# Altium PCB NEURAL_ECG.PcbDoc
Units mm, origin at the board's own origin, x right, y up, seen from the top; angles counter-clockwise.
Board outline 57.18 x 52.28 mm, 2 copper layers (Top Layer, Bottom Layer); 87 components, 158 nets, 421 pads, 93 vias.
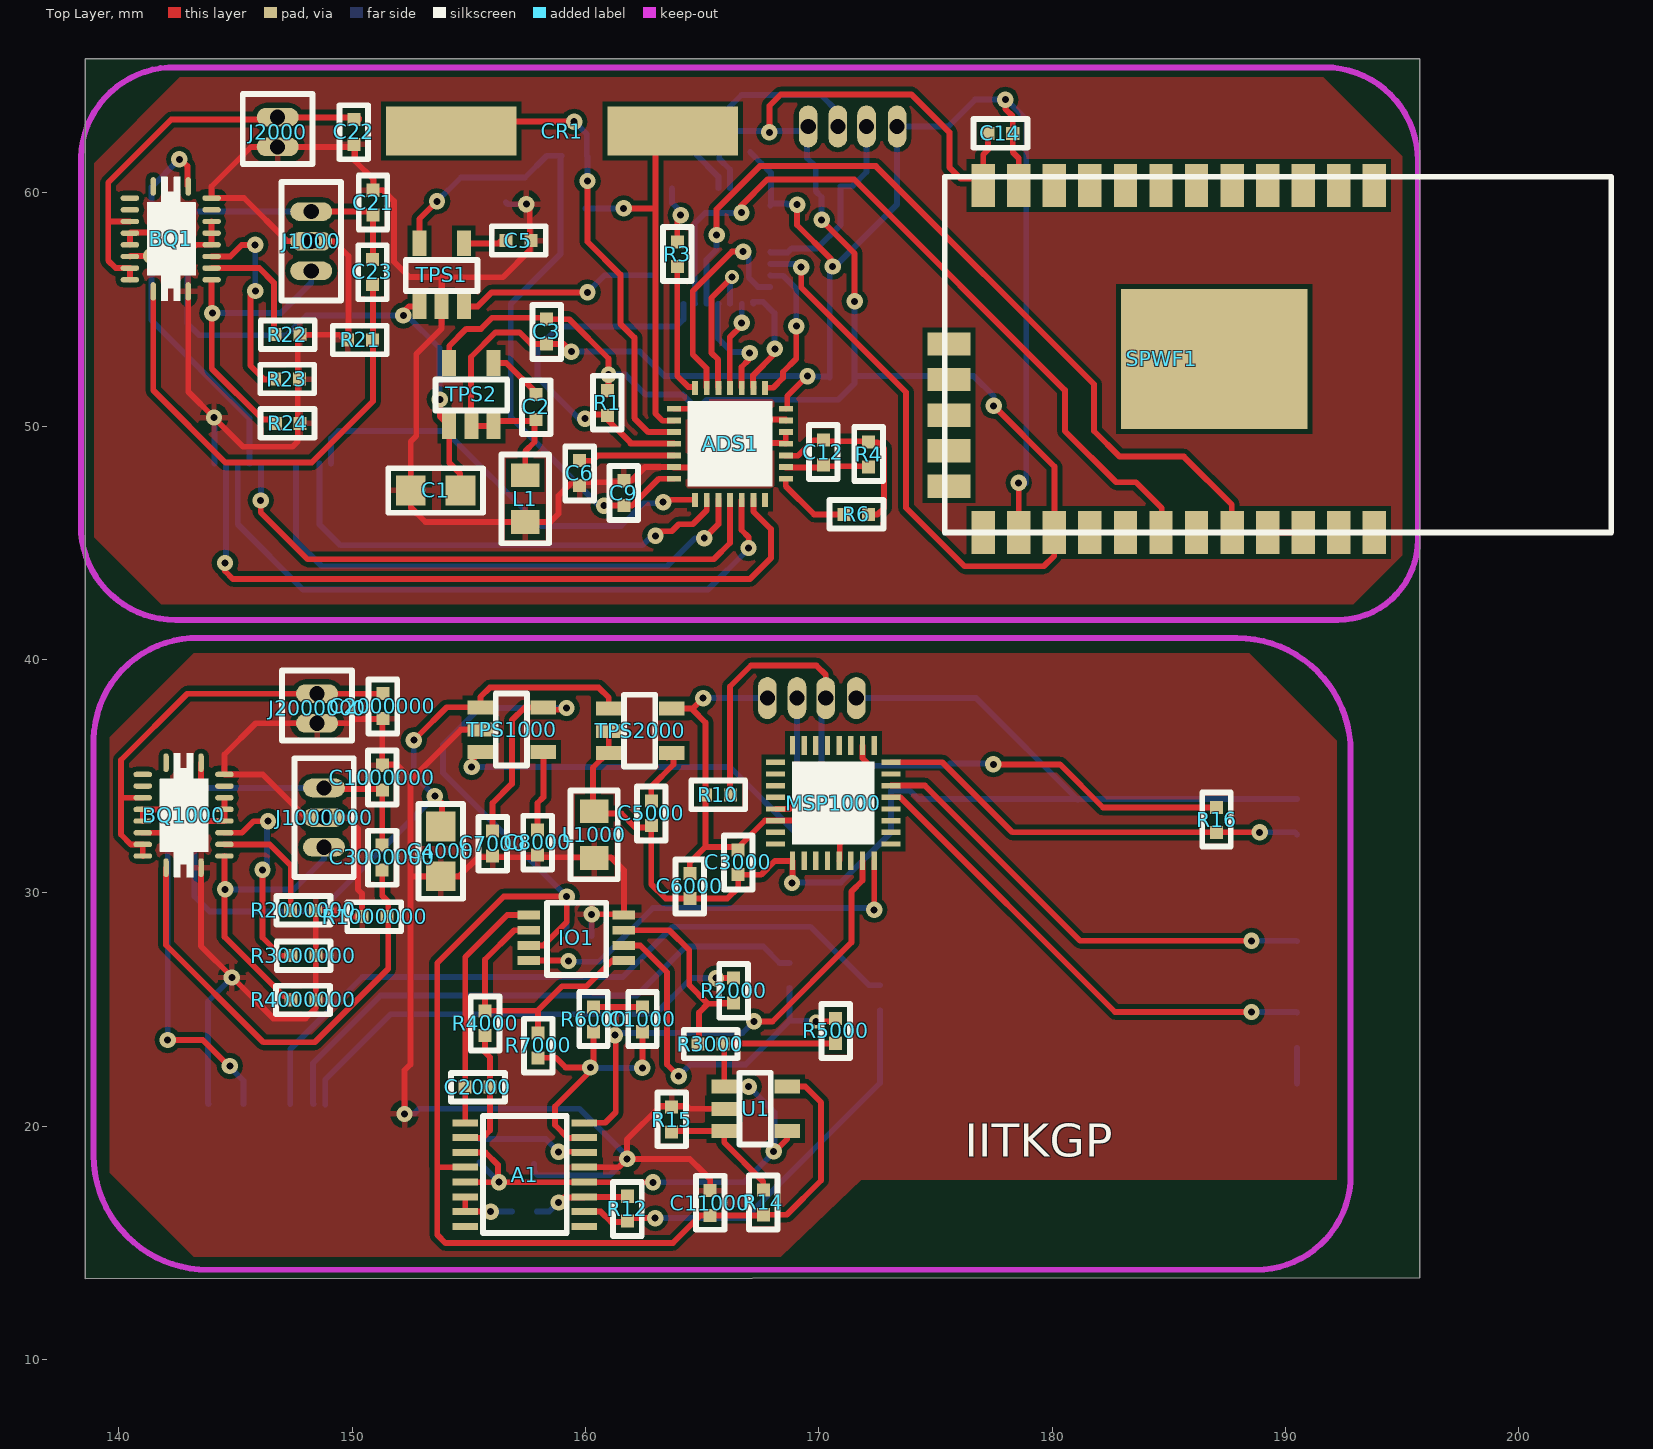
[diagram p0: Top Layer view]
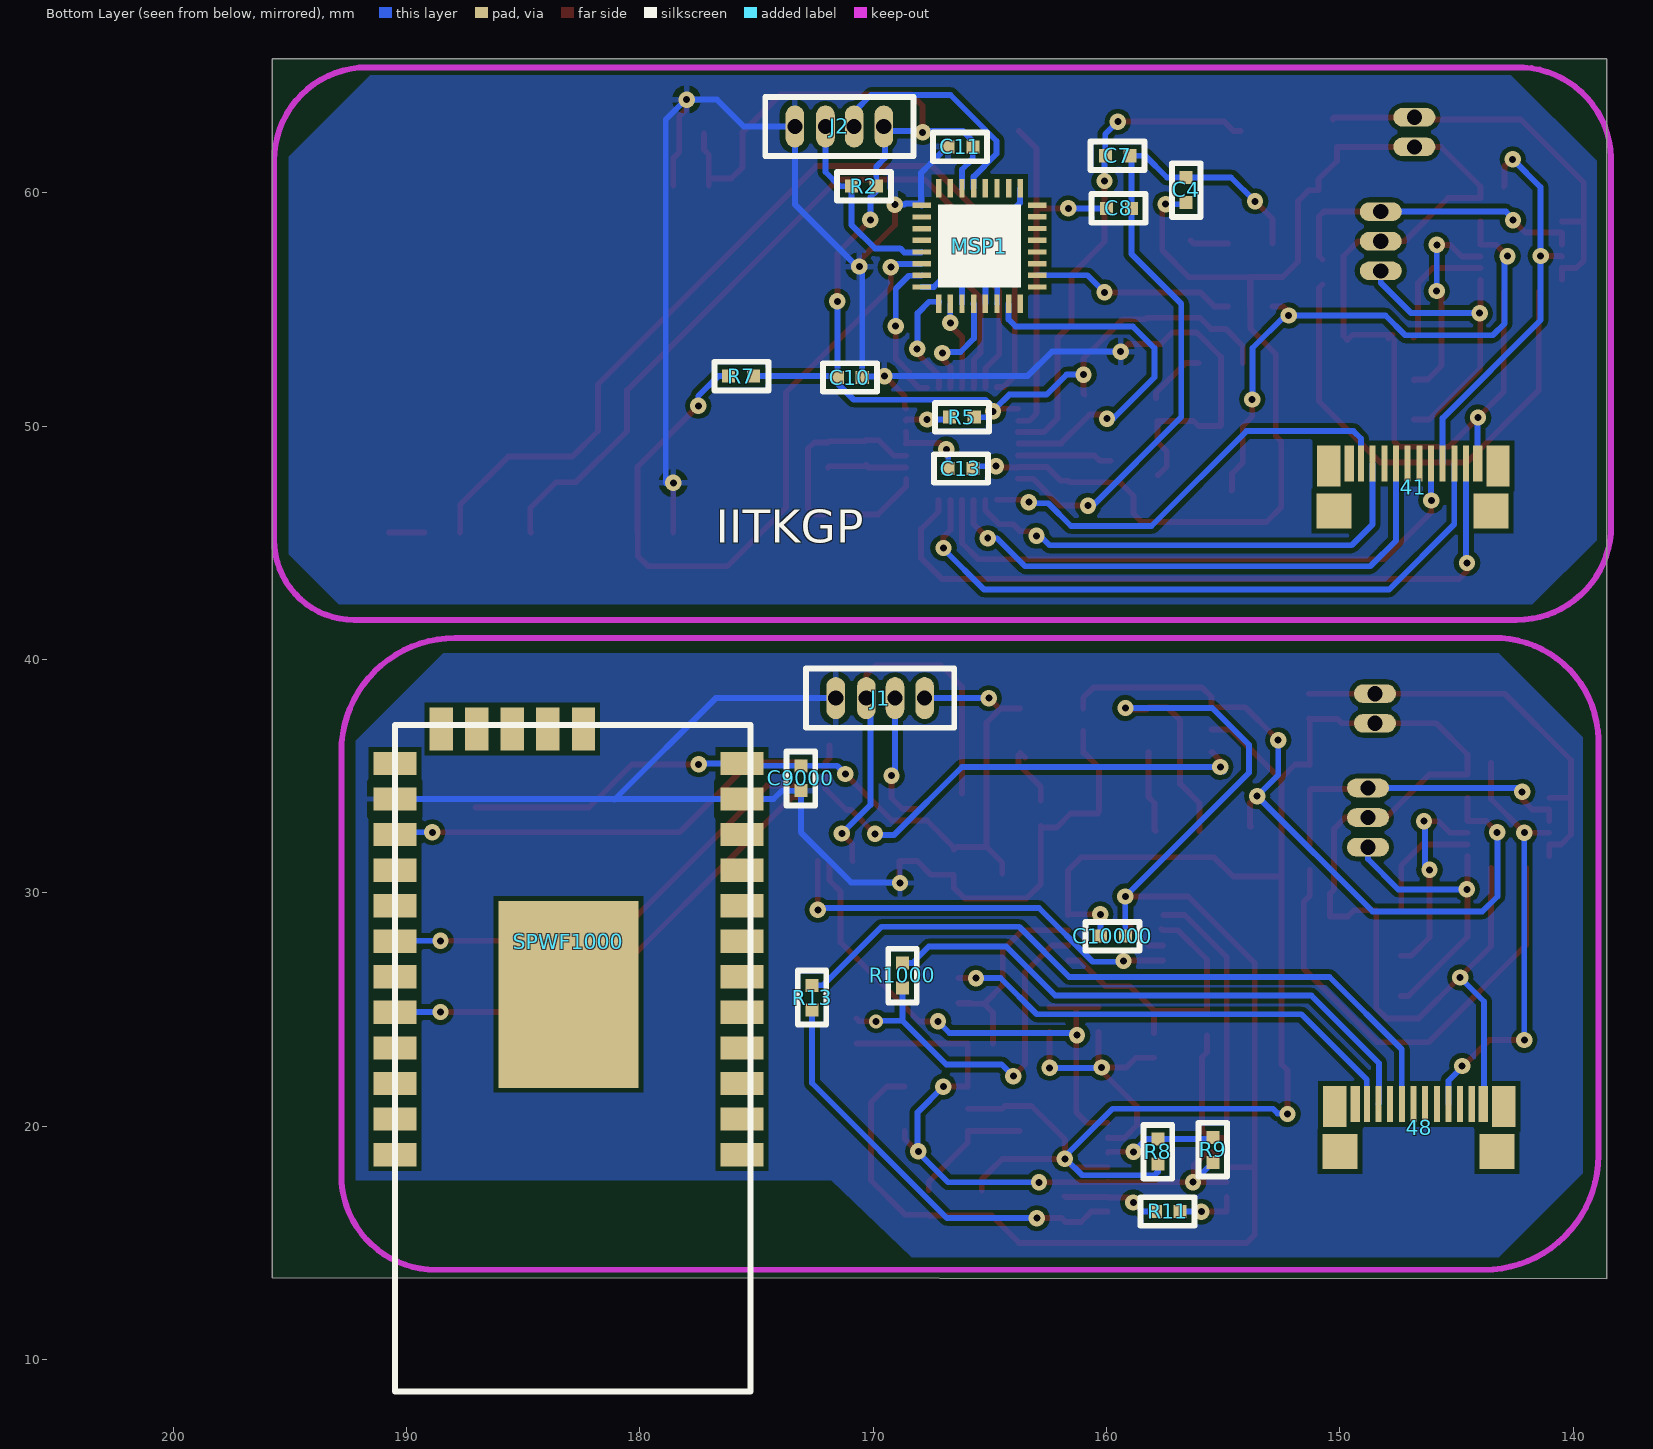
[diagram p1: Bottom Layer view, seen from below]

## Layer stack, top to bottom
Top Solder: solder mask 0.0102, Solder Resist, Dk 3.5
Top Layer: signal copper 0.0356
Dielectric 1: dielectric 0.32, FR-4, Dk 4.8
Bottom Layer: signal copper 0.0356
Bottom Solder: solder mask 0.0102, Solder Resist, Dk 3.5

## Board outline
138.575,65.75 138.575,13.474 195.75,13.502 195.75,65.75

## Design rules (kind name [scope] priority, off if disabled: settings)
Clearance [All] p1: gap=0.2 except(0.1: Track-THPad SMDPad-SMDPad Track-SMDPad THPad-THPad SMDPad-THPad; 0.254: Text-Text Region-Region Region-Text)
HoleSize [All] p1: absolutevalues=TRUE maxlimit=6 minlimit=0.3 maxpercent=80.000 minpercent=20.000
HoleToHoleClearance [All] p1: gap=0.2 allowstackedmicrovias=FALSE
MinimumSolderMaskSliver [All] p1: minsoldermaskwidth=0.1
PlaneConnect [All] p1: planeconnectstyle=Relief reliefexpansion=0.635 reliefentries=4 reliefconductorwidth=0.305 reliefairgap=0.254
PolygonConnect [All] p1: connectstyle=Relief reliefconductorwidth=0.254 reliefentries=4 polygonreliefangle="90 Angle" airgapwidth=0.254
RoutingVias [All] p1: holewidth=0.3 width=0.6 viastyle="Through Hole" minholewidth=0.3 minwidth=0.6 maxholewidth=1 maxwidth=2
SilkToSilkClearance [All] p1: silktosilkclearance=0
SilkToSolderMaskClearance [IsPad] p1: minsilkscreentomaskgap=0 clearancetoexposedcopper=TRUE
SolderMaskExpansion [All] p1: expansion=0.05
UnpouredPolygon [All] p1: allowunpoured=FALSE
Width Net_Width_13 [InNet('NET_432') Or InNet('T1') Or InNet('T2') Or InNet('VI00') Or InNet('VIN1') Or InNet('VREF') Or InNet('VREF00')] p1: maxlimit=0.3 minlimit=0.25 preferedwidth=0.25
Width Net_Width_12 [InNet('NET_58') Or InNet('NET_59') Or InNet('NET_60') Or InNet('NET_61') Or InNet('NET_62') Or InNet('NET_150') Or InNet('NET_151') Or InNet('NET_152') Or InNet('NET_153') Or InNet('NET_154') Or InNet('NET_155') Or InNet('NET_412') Or InNet('NET_422')] p2: maxlimit=0.3 minlimit=0.25 preferedwidth=0.25
Width Net_Width_11 [InNet('N2576742') Or InNet('N2590782') Or InNet('NET_44') Or InNet('NET_45') Or InNet('NET_47') Or InNet('NET_48') Or InNet('NET_49') Or InNet('NET_50') Or InNet('NET_51') Or InNet('NET_52') Or InNet('NET_53') Or InNet('NET_54') Or InNet('NET_55')] p3: maxlimit=0.3 minlimit=0.25 preferedwidth=0.25
Width Net_Width_10 [InNet('N1594672') Or InNet('N1621192') Or InNet('N2505072') Or InNet('N2505152') Or InNet('N2505592') Or InNet('N255762') Or InNet('N257674') Or InNet('N259078') Or InNet('N2543292') Or InNet('N2547222') Or InNet('N2549702') Or InNet('N2557622')] p4: maxlimit=0.3 minlimit=0.25 preferedwidth=0.25
Width Net_Width_9 [InNet('N1121792') Or InNet('N1122192') Or InNet('N1221322') Or InNet('N1374022') Or InNet('N1374062') Or InNet('N1381372') Or InNet('N1396582') Or InNet('N1402492') Or InNet('N1404412') Or InNet('N1404812') Or InNet('N1587662') Or InNet('N1590062')] p5: maxlimit=0.3 minlimit=0.25 preferedwidth=0.25
Width Net_Width_8 [InNet('N1116132') Or InNet('N1116232') Or InNet('N1116272') Or InNet('N1116312') Or InNet('N1117332') Or InNet('N1117472') Or InNet('N1117592') Or InNet('N1117672') Or InNet('N1120272') Or InNet('N1120352') Or InNet('N1120572') Or InNet('N1120612')] p6: maxlimit=0.3 minlimit=0.25 preferedwidth=0.25
Width Net_Width_7 [InNet('N250507') Or InNet('N250515') Or InNet('N250559') Or InNet('N254329') Or InNet('N254722') Or InNet('N254970') Or InNet('N0851300') Or InNet('N1115532') Or InNet('N1115572') Or InNet('N1115652') Or InNet('N1115692') Or InNet('N1115772')] p7: maxlimit=0.3 minlimit=0.25 preferedwidth=0.25
Width Net_Width_6 [InNet('N125949') Or InNet('N130962') Or InNet('N134506') Or InNet('N145397') Or InNet('N151961') Or InNet('N169568') Or InNet('N170391') Or InNet('N173715') Or InNet('N0174300') Or InNet('N174373') Or InNet('N176563') Or InNet('N0178100')] p8: maxlimit=0.3 minlimit=0.25 preferedwidth=0.25
Width Net_Width_5 [InNet('N108856') Or InNet('N108888') Or InNet('N108896') Or InNet('N108904') Or InNet('N108912') Or InNet('N108940') Or InNet('N109056') Or InNet('N109072') Or InNet('N109118') Or InNet('N109198') Or InNet('N109390') Or InNet('N109426') Or InNet('NET_56')] p9: maxlimit=0.3 minlimit=0.25 preferedwidth=0.25
Width Net_Width_4 [InNet('N108462') Or InNet('N108466') Or InNet('N108478') Or InNet('N108506') Or InNet('N108528') Or InNet('N108540') Or InNet('N108570') Or InNet('N108744') Or InNet('N108772') Or InNet('N108776') Or InNet('N108824') Or InNet('N108828') Or InNet('NET_57')] p10: maxlimit=0.3 minlimit=0.25 preferedwidth=0.25
Width Net_Width_3 [InNet('N005191') Or InNet('N009131') Or InNet('N0050200') Or InNet('N52684') Or InNet('N0053100') Or InNet('N58496') Or InNet('N58937') Or InNet('N0060300') Or InNet('N0074500') Or InNet('N108406') Or InNet('N108422') Or InNet('N108442')] p11: maxlimit=0.3 minlimit=0.25 preferedwidth=0.25
Width Net_Width_2 [InNet('DGND01') Or InNet('DVDD') Or InNet('DVDD01') Or InNet('DVDD1') Or InNet('EN_VDD') Or InNet('EN_VDD01') Or InNet('EN_VDD1') Or InNet('GND') Or InNet('N00388') Or InNet('N00672') Or InNet('N01323') Or InNet('N01965') Or InNet('N02367')] p12: maxlimit=0.3 minlimit=0.25 preferedwidth=0.25
Width Net_Width_1 [InNet('+IN') Or InNet('AGND') Or InNet('AGND00') Or InNet('AGND1') Or InNet('AGND01') Or InNet('AMPOUT') Or InNet('AMPOUT00') Or InNet('AMPOUT001') Or InNet('AVDD') Or InNet('AVDD00') Or InNet('AVDD1') Or InNet('AVDD01') Or InNet('DGND') Or InNet('DGND1')] p13: maxlimit=0.3 minlimit=0.25 preferedwidth=0.25
Width [All] p14: maxlimit=0.305 minlimit=0.254 preferedwidth=0.254
23 further rules are at their usual default settings.

## Components (designator, comment, footprint, x,y, rotation, side; value= is the part's Value field where it differs from the comment)
41 "" USB3.1_12 144.1,48.4 r180 bottom
48 "" USB3.1_12 143.85,20.95 r180 bottom
A1 "SSOP-16" SSOP-16 154.85,20.15 r0 top
ADS1 "WQFN-28" WQFN-28_REV1 164.7,46.85 r90 top
BQ1 "BQ24038" VQFN-20 141.48,60.28 r270 top
BQ1000 "BQ24038" VQFN-20 142.03,35.58 r270 top
C1 "22 u" SM/C_0805 154.65,47.25 r180 top
C2 "10 n" SM/C_0402#1 157.89,51.365 r270 top
C3 "10 u" SM/C_0402#1 158.34,54.59 r270 top
C4 "10 u" SM/C_0402#2 156.59,60.665 r90 bottom
C5 "10 n" SM/C_0402#1 156.6,57.96 r0 top
C6 "1 u" SM/C_0402#1 159.75,48.525 r270 top
C7 "22p" SM/C_0402#2 158.99,61.595 r180 bottom
C8 "22p" SM/C_0402#2 158.94,59.34 r180 bottom
C9 "0.1 u" SM/C_0402#1 161.65,46.6 r90 top
C10 "0.1u" SM/C_0402#2 171.54,52.09 r0 bottom
C11 "0.1 u" SM/C_0402#2 165.735,61.976 r180 bottom
C12 "C1" SM/C_0402#1 170.2,48.35 r90 top
C13 "0.1u" SM/C_0402#2 166.79,48.19 r0 bottom
C14 "0.1 u" SM/C_0402#1 177.25,62.55 r0 top
C21 "10 u" SM/C_0402#1 150.9,59.05 r90 top
C22 "10 u" SM/C_0402#1 150.075,63.15 r270 top
C23 "0.22u F" SM/C_0402#1 150.875,57.15 r270 top
C1000 "1.6n" SM/C_0402#1 162.45,24.05 r90 top
C2000 "0.1u" SM/C_0402#1 154.85,21.675 r0 top
C3000 "22 u" SM/C_0402#1 166.55,31.85 r270 top
C4000 "22 u" SM/C_0805 153.8,32.85 r270 top
C5000 "10 n" SM/C_0402#1 162.825,33.95 r270 top
C6000 "10 u" SM/C_0402#1 164.475,30.825 r270 top
C7000 "10 u" SM/C_0402#1 156.025,32.65 r270 top
C8000 "10 n" SM/C_0402#1 157.95,32.7 r270 top
C9000 "0.1uF" SM/C_0402#2 173.105,35.45 r90 bottom
C10000 "0.1u" SM/C_0402#2 159.2,28.15 r180 bottom
C11000 "0.1u" SM/C_0402#1 165.35,16.175 r90 top
C1000000 "10 u" SM/C_0402#1 151.297,34.407 r90 top
C2000000 "10 u" SM/C_0402#1 151.32,38.54 r270 top
C3000000 "0.22u F" SM/C_0402#1 151.294,32.053 r270 top
CR1 "4.096 M" HC/49US_REV1 163.75,62.65 r180 top
IO1 "MSOP-8" MSOP-8 161.65,27.1 r90 top
J1 "4 HEADER" CONNECTOR_4_REV1 167.8,38.35 r180 bottom
J2 "4 HEADER" CONNECTOR_4_REV2 169.55,62.85 r180 bottom
J1000 "Battery" CONNECTOR_3 148.25,59.2 r270 top
J2000 "Adapter" CONNECTOR_2 146.812,63.246 r270 top
J1000000 "Battery" CONNECTOR_3 148.8,34.5 r270 top
J2000000 "Adapter" CONNECTOR_2 148.5,38.54 r270 top
L1 "INDUCTOR" SM/L_0805 157.425,45.9 r90 top
L1000 "INDUCTOR" SM/L_0805 160.375,31.5 r90 top
MSP1 "MSP" QFN(RHB)-32_REV1 167.2,60.2 r0 bottom
MSP1000 "MSP" QFN(RHB)-32 168.15,32.1 r90 top
R1 "1M" SM/R_0402#1 160.94,50.465 r90 top
R2 "10 k" SM/R_0402#2 170.94,60.29 r0 bottom
R3 "0" SM/R_0402#1 163.94,56.84 r90 top
R4 "R" SM/R_0402#1 172.14,48.265 r90 top
R5 "1M" SM/R_0402#2 166.74,50.39 r0 bottom
R6 "R1" SM/R_0402#1 171.075,46.225 r0 top
R7 "10 k" SM/R_0402#2 176.2,52.15 r0 bottom
R8 "1M" SM/R_0402#2 157.805,19.45 r90 bottom
R9 "10K" SM/R_0402#2 155.45,18.45 r270 bottom
R10 "10K" SM/R_0402#1 165.15,34.2 r0 top
R11 "10K" SM/R_0402#2 156.85,16.35 r180 bottom
R12 "390K" SM/R_0402#1 161.8,17 r270 top
R13 "100K" SM/R_0402#1 172.625,24.975 r90 bottom
R14 "2k" SM/R_0402#1 167.625,17.275 r270 top
R15 "2k" SM/R_0402#1 163.7,19.75 r90 top
R16 "10K" SM/R_0402#1 187.05,32.6 r90 top
R21 "1.07 K" SM/R_0402#1 150.875,53.7 r180 top
R22 "37.4 k" SM/R_0402#1 146.7,53.925 r0 top
R23 "60.4 k" SM/R_0402#1 146.675,52.025 r0 top
R24 "10k" SM/R_0402#1 147.775,50.125 r180 top
R1000 "100k" SM/R_0402#1 168.75,27 r270 bottom
R2000 "100k" SM/R_0402#1 166.35,26.35 r270 top
R3000 "2M" SM/R_0402#1 164.825,23.525 r0 top
R4000 "1M" SM/R_0402#1 155.7,24.95 r270 top
R5000 "2M" SM/R_0402#1 170.725,24.625 r270 top
R6000 "1M" SM/R_0402#1 160.35,24.05 r90 top
R7000 "10K" SM/R_0402#1 157.975,24 r270 top
R1000000 "1.07 K" SM/R_0402#1 151.497,28.99 r180 top
R2000000 "37.4 k" SM/R_0402#1 147.37,29.255 r0 top
R3000000 "60.4 k" SM/R_0402#1 147.38,27.31 r0 top
R4000000 "10k" SM/R_0402#1 148.447,25.415 r180 top
SPWF1 "SPWF01" SPWF01_REV1 177.05,45.45 r0 top
SPWF1000 "SPWF01" SPWF01 190.5,35.55 r90 bottom
TPS1 "TPS78833" SOT-23-5 152.89,55.14 r0 top
TPS2 "TPS79933" SOT-23-5 154.165,50.015 r0 top
TPS1000 "TPS78833" SOT-23-5 155.5,37.95 r270 top
TPS2000 "TPS79933" SOT-23-5 161,37.9 r270 top
U1 "OPA336" SOT-23-5 165.95,21.7 r270 top

## Footprints (in the part's own frame and the unit in brackets; to place one, negate y for a bottom-side part, rotate by r counter-clockwise, add the part's x,y. Pads: shape width x height; smd on the part's side, far side on the other; paste and mask are expansions set on the pad)
CONNECTOR_2 [mm]
  oval 0.799x1.799 / inner round 1.524 / far side oval 0.8x1.8 hole 0.649 mask+0.101: 1(0,0) 2(1.27,0)
  silkscreen extent -1,-1.5 2,1.5
CONNECTOR_3 [mm]
  oval 0.799x1.799 / inner round 1.524 / far side oval 0.8x1.8 hole 0.649 paste+0.1 mask+0.101: 1(0,0) 2(1.27,0) 3(2.54,0)
  silkscreen extent -1.27,-1.27 3.81,1.27
CONNECTOR_4_REV1 [mm]
  oval 0.799x1.799 / inner round 1.524 / far side oval 0.799x1.799 hole 0.649 mask+0.101: 1(0,0) 2(-1.27,0) 3(-2.5,0) 4(-3.81,0)
  silkscreen extent -5.08,-1.27 1.27,1.27
CONNECTOR_4_REV2 [mm]
  oval 0.799x1.799 / inner round 1.524 / far side oval 0.799x1.799 hole 0.649 mask+0.101: 1(0,0) 2(-1.27,0) 3(-2.5,0) 4(-3.81,0)
  silkscreen extent -5.08,-1.27 1.27,1.27
HC/49US_REV1 [mm]
  rect 5.6x2.1 smd paste+0.099 mask+0.099: 1(0,0) 2(9.5,0)
MSOP-8 [mm]
  rect 0.379x0.974 smd paste+0.098 mask+0.101: 1(0,0) 2(0.65,0) 3(1.3,0) 4(1.95,0) 5(1.95,4.075) 6(1.3,4.075) 7(0.65,4.075) 8(0,4.075)
  silkscreen extent -0.62,0.76 2.48,3.3
QFN(RHB)-32 [mm]
  rect 0.8x0.229 smd paste+0.1 mask+0.101: 1(-0.725,-0.73) 2(-0.725,-1.23) 3(-0.725,-1.73) 4(-0.725,-2.23) 5(-0.725,-2.73) 6(-0.725,-3.23) 7(-0.725,-3.73) 8(-0.725,-4.23) 17(4.22,-4.23) 18(4.22,-3.73) 19(4.22,-3.23) 20(4.22,-2.73) 21(4.22,-2.23) 22(4.22,-1.725) 23(4.22,-1.225) 24(4.225,-0.725)
  rect 0.229x0.8 smd paste+0.1 mask+0.101: 9(0,-4.95) 10(0.5,-4.95) 11(1,-4.95) 12(1.5,-4.95) 13(2,-4.95) 14(2.5,-4.95) 15(3,-4.95) 16(3.5,-4.95) 25(3.5,0) 26(3,0) 27(2.5,0) 28(2,0) 29(1.5,0) 30(1,0) 31(0.5,0) 32(0,0)
  silkscreen extent -0.02,-4.24 3.52,-0.71
QFN(RHB)-32_REV1 [mm]
  rect 0.8x0.229 smd paste+0.1 mask+0.101: 1(0.725,0.73) 2(0.725,1.23) 3(0.725,1.73) 4(0.725,2.23) 5(0.725,2.73) 6(0.725,3.23) 7(0.725,3.73) 8(0.725,4.23) 17(-4.22,4.23) 18(-4.22,3.73) 19(-4.22,3.23) 20(-4.22,2.73) 21(-4.22,2.23) 22(-4.22,1.725) 23(-4.22,1.225) 24(-4.225,0.725)
  rect 0.229x0.8 smd paste+0.1 mask+0.101: 9(0,4.95) 10(-0.5,4.95) 11(-1,4.95) 12(-1.5,4.95) 13(-2,4.95) 14(-2.5,4.95) 15(-3,4.95) 16(-3.5,4.95) 25(-3.5,0) 26(-3,0) 27(-2.5,0) 28(-2,0) 29(-1.5,0) 30(-1,0) 31(-0.5,0) 32(0,0)
  silkscreen extent -3.52,0.71 0.02,4.24
SM/C_0402#1 [mil]
  rect 22x22 smd: 1(0,0) 2(42,0)
  silkscreen extent -24,-24 67,24
SM/C_0402#2 [mil]
  rect 22x22 smd: 1(0,0) 2(-42,0)
  silkscreen extent -67,-24 24,24
SM/C_0805 [mil]
  rect 50x50 smd: 1(0,0) 2(84,0)
  silkscreen extent -38,-38 122,38
SM/L_0805 [mil]
  rect 40x48 smd: 1(0,0) 2(79,0)
  silkscreen extent -36,-40 114,40
SM/R_0402#1 [mil]
  rect 22x22 smd: 1(0,0) 2(42,0)
  silkscreen extent -24,-24 67,24
SM/R_0402#2 [mil]
  rect 22x22 smd: 1(0,0) 2(-42,0)
  silkscreen extent -67,-24 24,24
SOT-23-5 [mm]
  rect 0.599x1.1 smd paste+0.1 mask+0.101: 1(0,0) 2(0.95,0) 3(1.9,0) 4(1.9,2.7) 5(0,2.7)
  silkscreen extent -0.59,0.66 2.48,1.99
SPWF01 [mm]
  rect 1x1.85 smd paste+0.1 mask+0.1: 1(0,0) 2(-1.524,0) 3(-3.048,0) 4(-4.572,0) 5(-6.096,0) 6(-7.62,0) 7(-9.144,0) 8(-10.668,0) 9(-12.192,0) 10(-13.716,0) 11(-15.24,0) 12(-16.764,0) 13(-16.764,-14.87) 14(-15.24,-14.87) 15(-13.716,-14.87) 16(-12.192,-14.87) 17(-10.668,-14.87) 18(-9.144,-14.87) 19(-7.62,-14.87) 20(-6.096,-14.87) 21(-4.572,-14.87) 22(-3.048,-14.87) 23(-1.524,-14.87) 24(0,-14.87)
  rect 8x5.999 smd paste+0.1 mask+0.1: 25(-9.9,-7.435)
  rect 1.85x1 smd paste+0.1 mask+0.1: 26(1.47,-8.076) 27(1.47,-6.552) 28(1.47,-5.028) 29(1.47,-3.504) 30(1.47,-1.98)
  silkscreen extent -26.92,-15.24 1.65,0
SPWF01_REV1 [mm]
  rect 1x1.85 smd paste+0.1 mask+0.1: 1(0,0) 2(1.524,0) 3(3.048,0) 4(4.572,0) 5(6.096,0) 6(7.62,0) 7(9.144,0) 8(10.668,0) 9(12.192,0) 10(13.716,0) 11(15.24,0) 12(16.764,0) 13(16.764,14.87) 14(15.24,14.87) 15(13.716,14.87) 16(12.192,14.87) 17(10.668,14.87) 18(9.144,14.87) 19(7.62,14.87) 20(6.096,14.87) 21(4.572,14.87) 22(3.048,14.87) 23(1.524,14.87) 24(0,14.87)
  rect 8x5.999 smd paste+0.1 mask+0.1: 25(9.9,7.435)
  rect 1.85x1 smd paste+0.1 mask+0.1: 26(-1.47,8.076) 27(-1.47,6.552) 28(-1.47,5.028) 29(-1.47,3.504) 30(-1.47,1.98)
  silkscreen extent -1.65,0 26.92,15.24
SSOP-16 [mm]
  rect 1.1x0.3 smd paste+0.1 mask+0.1: 1(0,0) 2(0,-0.635) 3(0,-1.27) 4(0,-1.905) 5(0,-2.54) 6(0,-3.175) 7(0,-3.81) 8(0,-4.445) 9(5.1,-4.445) 10(5.1,-3.81) 11(5.1,-3.175) 12(5.1,-2.54) 13(5.1,-1.905) 14(5.1,-1.27) 15(5.1,-0.635) 16(5.1,0)
  silkscreen extent 0.76,-4.72 4.35,0.29
USB3.1_12 [mm]
  rect 0.41x1.549 smd paste+0.05 mask+0.05: 1(0,0) 12(-5.5,0)
  rect 0.26x1.549 smd paste+0.05 mask+0.05: 2(-0.5,0) 3(-1,0) 4(-1.5,0) 5(-2,0) 6(-2.5,0) 7(-3,0) 8(-3.5,0) 9(-4,0) 10(-4.5,0) 11(-5,0)
  rect 1x1.749 smd paste+0.05 mask+0.05: 13(0.875,-0.1) 14(-6.375,-0.1)
  rect 1.499x1.499 smd paste+0.05 mask+0.05: 15(0.575,-2.025) 16(-6.15,-2.025)
VQFN-20 [mm]
  oval 0.799x0.229 smd paste+0.101 mask+0.1: 1(0,0) 10(4.5,0) 11(4.5,1.5) 20(0,1.5)
  oval 0.229x0.799 smd paste+0.101 mask+0.1: 2(0.5,-1) 3(1,-1) 4(1.5,-1) 5(2,-1) 6(2.5,-1) 7(3,-1) 8(3.5,-1) 9(4,-1) 12(4,2.5) 13(3.5,2.5) 14(3,2.5) 15(2.5,2.5) 16(2,2.5) 17(1.5,2.5) 18(1,2.5) 19(0.5,2.5)
  silkscreen extent -0.41,-0.26 4.91,1.81
WQFN-28_REV1 [mm]
  rect 0.599x0.25 smd paste+0.1 mask+0.101: 1(0,0) 2(0,-0.5) 3(0,-1) 4(0,-1.5) 5(0,-2) 6(0,-2.5) 7(0,-3) 15(4.8,-3) 16(4.8,-2.5) 17(4.8,-2) 18(4.8,-1.5) 19(4.8,-1) 20(4.8,-0.5) 21(4.8,0)
  rect 0.25x0.599 smd paste+0.1 mask+0.101: 8(0.9,-3.9) 9(1.4,-3.9) 10(1.9,-3.9) 11(2.4,-3.9) 12(2.9,-3.9) 13(3.4,-3.9) 14(3.9,-3.9) 22(3.9,0.9) 23(3.4,0.9) 24(2.9,0.9) 25(2.4,0.9) 26(1.9,0.9) 27(1.4,0.9) 28(0.9,0.9)
  silkscreen extent 0.59,-3.31 4.21,0.31

## Via types
v1: diameter 0.7, hole 0.3, Top Layer to Bottom Layer, 91 vias
v2: diameter 0.6, hole 0.3, Top Layer to Bottom Layer, 2 vias

## Nets (pads, with @x,y where several pads share a name; then routed paths per layer and width w, separated by ;. In a path a pad name is that pad's centre, name@x,y a point inside that pad or via, vN(x,y) a via of type N, cw(c..) or ccw(c..) an arc to the next point about the centre after c; other vN are vias at no path point)
+IN: 
AGND: 
AGND00: 
AGND1: 
AGND01: 
AMPOUT: 
AMPOUT00: 
AMPOUT001: 
AVDD: 
AVDD00: 
AVDD1: 
AVDD01: 
DGND: 
DGND1: 
DGND01: 
DVDD: 
DVDD01: 
DVDD1: 
EN_VDD: 
EN_VDD01: 
EN_VDD1: 
GND1: 41.1 ADS1.27 BQ1.11 BQ1.19 C1.2 C4.2 C5.2 C6.2 C9.2 C13.2 C21.2 C22.2 J1000.2 J2000.2 L1.1 R21.2 R22.2 R23.2 R24.1 TPS1.2 | length 78.6
  Top Layer w0.25: BQ1.11 142.98,51.479 v1(144.085,50.374) 144.1,50.35 145.325,49.125 147.45,49.125 147.675,49.35 R22.2@147.675,53.69 ; R22.2@147.917,53.8 147.917,53.76 147.752,53.925 149.458,53.925 R21.2@149.683,53.7 ; R21.2@149.68,53.69 149.683,53.693 R21.2@149.683,53.7 ; v1@157.617,59.517 157.617,57.542 156.465,56.39 153.84,56.39 TPS1.2 ; ADS1.27@163.791,48.24 v1@164.74,48.24 ; ADS1.27 162.55,48.25 161.967,47.667 C9.2 161.583,47.6 159.917,47.6 159.9,47.583 159.408,47.583 158.85,47.025 158.85,46.25 158.5,45.9 153.15,45.9 152.516,46.534 C1.2 152.516,49.35 152.75,49.584 152.75,53.1 153.84,54.19 TPS1.2 ; R21.2@149.683,53.7 149.85,53.867 149.85,57.3 149.22,57.93 J1000.2 147.22,57.93 145.37,59.78 BQ1.19 143.98,60.28 145.67,61.97 150.125,61.97 150.125,61.375 150.925,60.575 150.925,60.117 151.333,60.117 151.8,59.65 151.8,57.05 152.45,56.4 153.85,56.4 153.85,55.15 TPS1.2
  Bottom Layer w0.25: v1@144.061,50.35 v1(144.085,50.374) 144.1,50.35 41.1 ; C4.2 156.672,59.517 v1(157.467,59.517) ; v1(164.74,48.29) 165.623,48.29 C13.2
GND2: 48.1 A1.13 BQ1000.11 BQ1000.19 C4000.2 C7000.2 C8000.2 C10000.2 C11000.2 C1000000.2 C2000000.2 IO1.4 J1000000.2 J2000000.2 L1000.1 R8.2 R15.2 R1000000.2 R2000000.2 R3000000.2 R4000000.1 TPS1000.2 U1.2 | length 104
  Top Layer w0.25: BQ1000.11 143.53,27.72 v1@144.85,26.4 ; v1(144.85,26.376) v1@144.85,26.4 ; C1000000.2@151.3,35.5 C1000000.2@151.326,35.5 ; C2000000.2 C2000000.2@151.297,37.45 ; v1(152.25,20.528) 152.406,20.528 152.25,20.684 152.25,22.4 152.5,22.65 152.5,34.925 151.925,35.5 C1000000.2@151.326,35.5 ; 152.541,30.7 154.575,30.7 155.408,31.533 161.092,31.533 161.65,30.975 IO1.4 161.617,29.083 v1(160.267,29.083) ; 152.55,34.875 154.675,37 TPS1000.2 ; A1.13 161.426,18.245 v1(161.788,18.607) ; C11000.2 165.35,17.725 165.025,18.05 164.475,18.6 161.795,18.6 v1(161.788,18.607) ; U1.2 164.467,20.75 164.35,20.867 163.217,20.867 161.788,19.438 v1(161.788,18.607) ; v1@144.85,26.4 146.625,24.625 148,24.625 148.447,25.072 R3000000.2 148.447,29.255 149.395,29.255 149.66,28.99 R1000000.2 150.43,29.97 150.25,30.15 150.25,32.75 149.77,33.23 J1000000.2 148.02,33.23 146.17,35.08 BQ1000.19 144.53,35.93 145.87,37.27 J2000000.2 149.92,37.27 150.1,37.45 C2000000.2@151.297,37.45 ; C2000000.2@151.297,37.45 C1000000.2 C1000000.2@151.326,35.5
  Bottom Layer w0.25: 48.1 143.825,20.975 143.825,25.351 v1(144.85,26.376) ; v1(152.25,20.528) 152.275,20.553 152.676,20.553 152.873,20.75 159.75,20.75 161.85,18.65 161.807,18.607 v1(161.788,18.607) 161.781,18.6 161.75,18.6 161.05,17.9 157.95,17.9 157.805,18.045 R8.2 ; C10000.2 v1(160.267,29.083)
N00388: 
N00672: 
N01323: 
N01965: 
N02367: 
N005191: 
N009131: 
N0050200: 
N52684: 
N0053100: 
N58496: 
N58937: 
N0060300: 
N0074500: 
N108406: MSP1.18 TPS1.3 | length 8.7
  Top Layer w0.25: TPS1.3 155.39,55.14 155.99,55.74 v1(160.09,55.74)
  Bottom Layer w0.25: v1(160.09,55.74) 160.82,56.47 MSP1.18
N108422: ADS1.20 MSP1.8 | length 9.6
  Top Layer w0.25: ADS1.20 165.19,51.66 165.19,52.49 164.6,53.08 164.6,55.8 166.29,57.49 166.755,57.49 v1(166.764,57.481)
  Bottom Layer w0.25: v1(166.764,57.481) 167,57.245 167,56.375 167.405,55.97 MSP1.8
N108442: ADS1.17 MSP1.12 | length 4.8
  Top Layer w0.25: ADS1.17 166.69,51.66 166.69,52.54 167,52.85 167,53.1 v1(167.04,53.14)
  Bottom Layer w0.25: MSP1.12 165.69,55.24 165.69,53.76 166.261,53.189 167.04,53.189 v1(167.04,53.14)
N108462: ADS1.16 MSP1.9 | length 4.8
  Top Layer w0.25: ADS1.16 167.19,51.66 167.19,52.19 168.118,53.118 v1(168.118,53.319)
  Bottom Layer w0.25: MSP1.9 167.2,55.33 167.19,55.34 167.61,55.34 168.1,54.85 168.1,53.35 168.118,53.368 v1(168.118,53.319)
N108466: ADS1.14 C2.2 C3.2 C10.2 C11.2 C14.2 J2.4 L1.2 MSP1.1 SPWF1.2 SPWF1.23 TPS2.2 TPS2.3 | length 74.6
  Top Layer w0.25: L1.2@157.8,47.907 157.425,48.282 157.425,48.925 157.823,49.323 157.823,50.215 157.813,50.225 156.275,50.225 TPS2.3 TPS2.2 155.1,50.03 155.1,52.974 156.149,54.025 157.174,54.025 157.677,53.523 C3.2 159.077,53.523 v1(159.4,53.2) ; ADS1.14 168.65,50.8 168.65,51.3 169.499,52.149 169.515,52.149 169.522,52.142 v1(169.522,52.148) ; v1(169.075,59.5) 169.075,58.625 170.5,57.2 170.5,56.946 v1(170.601,56.845) ; v1(178,64) 178,63.6 178.317,63.283 C14.2 178.317,61.75 178.574,61.493 SPWF1.23 SPWF1.23@178.57,60.324 ; SPWF1.2 v1(178.574,47.576)
  Bottom Layer w0.25: v1(159.4,53.2) 162.34,53.2 163.4,52.15 169.04,52.15 169.515,52.149 v1(169.522,52.148) v1(169.522,52.148) 169.522,52.142 169.534,52.13 169.544,52.14 170.423,52.14 C10.2 v1@170.473,56.623 ; C11.2@167.067,61.75 167.55,61.267 167.95,60.867 167.95,59.495 MSP1.1 168.005,59.55 168.624,59.55 168.674,59.5 v1(169.075,59.5) ; v1(170.601,56.845) 170.495,56.845 170.473,56.823 v1@170.473,56.623 ; v1(178.574,47.576) 178.897,47.576 178.897,63.153 178.05,64 v1(178,64) 176.7,64 175.55,62.85 173.35,62.85 173.35,59.5 v1@170.473,56.623
N108478: ADS1.22 C3.1 C10.1 C11.1 C14.1 J2.1 MSP1.30 R1.2 R2.2 R5.2 R7.2 SPWF1.24 TPS2.5 | length 61
  Top Layer w0.25: TPS2.5 154.165,53.44 154.9,54.175 155.525,54.175 156,54.65 158.28,54.65 C3.1 159.31,54.59 160.99,52.91 v1(160.99,52.216) 160.99,51.407 R1.2@160.94,51.357 ; ADS1.22 164.767,50.75 v1(164.873,50.644) ; v1@164.79,50.79 164.8,50.75 v1(164.873,50.644) ; v1@164.84,50.79 v1(164.873,50.644) ; v1(167.887,62.598) 167.887,63.737 168.375,64.225 173.964,64.225 175.6,62.6 175.6,61.1 176.075,60.625 177.046,60.625 SPWF1.24@177.05,60.621 ; v1(170.125,58.85) 170.125,58.825 171.541,57.409 v1(171.541,55.358) ; SPWF1.24 SPWF1.24@177.05,60.621 ; C14.1 177.25,61.85 177.05,61.65 SPWF1.24@177.05,60.621
  Bottom Layer w0.25: v1(160.99,52.216) 161.714,52.216 162.573,51.357 164.173,51.357 164.74,50.79 v1@164.79,50.79 ; v1(164.873,50.644) v1@164.873,50.657 ; R5.2 165.14,50.39 v1@164.873,50.657 ; MSP1.30 166.2,61.003 165.735,61.468 165.735,62.23 166.155,62.65 169.25,62.65 169.5,62.4 169.5,61.5 169.873,61.127 R2.2 169.873,60.077 170.125,59.825 v1(170.125,58.85) ; v1(167.887,62.598) v1@167.889,62.6 ; v1(171.541,55.358) C10.1 ; R7.2 171.6,52.15 C10.1 ; v1@164.79,50.79 v1@164.84,50.739 ; v1@164.79,50.79 v1@164.84,50.79 ; v1@164.84,50.739 v1@164.84,50.79 ; v1@164.84,50.739 164.84,50.69 v1@164.873,50.657 ; v1@164.84,50.79 165.19,51.14 170.84,51.14 171.54,51.84 C10.1
N108506: ADS1.19 MSP1.11 | length 6.4
  Top Layer w0.25: ADS1.19 165.69,51.66 165.69,52.86 165.4,53.15 165.4,55.5 166.275,56.375 v2(166.275,56.4)
  Bottom Layer w0.25: MSP1.11 166.2,56.325 v2(166.275,56.4)
N108528: 
N108540: ADS1.28 C4.1 C7.1 C8.1 C9.1 TPS1.5 | length 29.6
  Top Layer w0.25: TPS1.5 152.89,58.89 v1(153.64,59.64) ; v1@160.617,46.683 160.7,46.6 v1(160.8,46.6) C9.1 162.001,46.6 163.15,47.75 ADS1.28
  Bottom Layer w0.25: v1(153.64,59.64) 154.665,60.665 C4.1 157.416,60.665 158.345,61.595 C7.1 158.94,61.545 C8.1 158.94,57.39 156.8,55.25 156.8,50.4 160.6,46.6 v1(160.8,46.6)
N108570: ADS1.18 MSP1.10 | length 3.8
  Top Layer w0.25: ADS1.18 166.19,51.66 166.19,53.816 166.698,54.324 v1(166.698,54.432)
  Bottom Layer w0.25: v1(166.698,54.432) 166.7,54.434 MSP1.10
N108744: ADS1.25 MSP1.15 R1.1 | length 15.8
  Top Layer w0.25: v1(159.981,50.325) 160.156,50.5 160.73,50.5 160.94,50.29 161.94,49.29 ; 161.94,49.265 ADS1.25@163.791,49.265
  Bottom Layer w0.25: v1(159.981,50.325) 159.968,50.338 159.712,50.338 157.95,52.1 157.95,53.35 158.875,54.275 163.9,54.275 164.2,54.575 MSP1.15
N108772: ADS1.13 R5.1 | length 1.9
  Top Layer w0.25: v1(167.69,50.29) 168.59,50.29 168.6,50.28 ADS1.13
  Bottom Layer w0.25: R5.1 166.84,50.29 v1(167.69,50.29)
N108776: ADS1.11 ADS1.12 C13.1 | length 3.3
  Top Layer w0.25: v1(166.869,49.011) 167.148,49.29 168.559,49.29 ADS1.11 168.59,49.26 168.59,49.74 ADS1.12
  Bottom Layer w0.25: C13.1 166.79,49.04 166.84,49.04 v1(166.869,49.011)
N108824: ADS1.10 C12.2 R4.2 R6.2 | length 8
  Top Layer w0.25: ADS1.10@168.59,48.74 169.115,48.74 169.775,49.4 170.283,49.4 170.3,49.417 170.36,49.357 171.89,49.357 171.94,49.307 172.523,49.307 172.8,49.051 172.8,46.5 172.525,46.225 R6.2@172.09,46.225
N108828: ADS1.8 R6.1 | length 3.3
  Top Layer w0.25: ADS1.8@168.59,47.74 168.59,47.435 169.8,46.225 R6.1
N108856: 
N108888: 
N108896: 
N108904: 
N108912: 
N108940: 
N109056: ADS1.24 C7.2 CR1.2 | length 21.2
  Top Layer w0.25: CR1.2 154.55,62.65 154.959,63.058 v1(159.522,63.058) ; v1(160.09,60.51) 160.09,57.91 161.5,56.5 161.5,54.4 162.1,53.8 162.1,50.35 162.7,49.75 ADS1.24
  Bottom Layer w0.25: v1(159.522,63.058) 160.057,62.523 C7.2 160.09,61.562 v1(160.09,60.51)
N109072: ADS1.23 C8.2 CR1.1 | length 16.3
  Top Layer w0.25: v1(161.64,59.34) 162.99,59.34 163,59.35 ; CR1.1 163,61.9 163,59.35 ; ADS1.23@163.791,50.24 163.31,50.24 163,50.55 163,59.35
  Bottom Layer w0.25: C8.2 v1(161.64,59.34)
N109118: ADS1.26 C6.1 | length 4.1
  Top Layer w0.25: C6.1@159.825,48.525 160.3,48.525 160.525,48.75 ADS1.26
N109198: 
N109390: C2.1 TPS2.4 | length 2.6
  Top Layer w0.25: TPS2.4 156.61,52.715 157.89,51.435 C2.1@157.89,51.215
N109426: C5.1 TPS1.4 | length 1.7
  Top Layer w0.25: TPS1.4 156.28,57.84 C5.1@156.4,57.96
N125949: MSP1.25 R3.2 | length 2.6
  Top Layer w0.25: R3.2 163.94,58.906 v1(164.085,59.051)
  Bottom Layer w0.25: MSP1.25@163.715,60.19 163.715,59.576 164.085,59.206 v1(164.085,59.051) v1@163.979,59.051
N130962: J2.3 MSP1.5 R2.1 | length 8.1
  Bottom Layer w0.25: MSP1.5 167.945,57.45 168.675,57.45 168.85,57.625 169.925,57.625 170.94,58.64 R2.1 171.44,60.29 172.05,60.9 J2.3@172.05,62.501
N134506: J2.2 MSP1.29 | length 9.9
  Bottom Layer w0.25: MSP1.29 165.7,60.7 164.719,61.681 164.719,62.23 166.689,64.2 170.1,64.2 170.82,63.48 J2.2@170.82,63.2
N145397: ADS1.21 R3.1 | length 5.7
  Top Layer w0.25: R3.1 163.94,52.16 164.41,51.69 164.69,51.69 164.7,51.68 ADS1.21
N151961: ADS1.9 C12.1 R4.1 | length 3.4
  Top Layer w0.25: ADS1.9@168.59,48.24 C12.1@170.24,48.24 ; C12.1@170.24,48.29 170.3,48.35 170.36,48.29 171.89,48.29 R4.1@171.94,48.24
N169568: MSP1.13 SPWF1.8 | length 35.5
  Top Layer w0.25: v1(165.625,58.2) 165.625,59.3 167.475,61.15 172.45,61.15 181.8,51.8 181.8,49.8 182.9,48.7 185.65,48.7 187.7,46.65 187.7,45.468 SPWF1.8
  Bottom Layer w0.25: MSP1.13 165.19,55.26 165.19,57.14 165.625,57.575 v1(165.625,58.2)
N170391: MSP1.14 SPWF1.6 | length 32.4
  Top Layer w0.25: v1(166.692,59.157) 166.675,59.14 166.675,59.45 167.8,60.575 171.525,60.575 180.55,51.55 180.55,49.8 182.75,47.6 183.6,47.6 184.7,46.5 184.7,45.48 SPWF1.6
  Bottom Layer w0.25: MSP1.14 164.69,55.26 164.69,58.69 165.14,59.14 166.675,59.14 v1(166.692,59.157)
N173715: ADS1.15 MSP1.7 | length 6.4
  Top Layer w0.25: ADS1.15 168.05,51.65 168.475,52.075 168.475,52.325 169.04,52.89 v1(169.04,54.29)
  Bottom Layer w0.25: MSP1.7 167.945,56.45 168.48,56.45 169.04,55.89 v1(169.04,54.29)
N0174300: 
N174373: MSP1.6 R7.1 SPWF1.3 | length 30.7
  Top Layer w0.25: v1(169.25,56.822) 169.25,55.95 173.74,51.46 173.74,46.51 176.25,44 179.65,44 180.094,44.444 180.094,45.446 SPWF1.3 180.1,45.452 180.1,48.278 v1(177.5,50.878)
  Bottom Layer w0.25: MSP1.6 167.945,56.95 169.122,56.95 v1(169.25,56.822) ; R7.1 176.65,52.15 177.5,51.3 v1(177.5,50.878)
N176563: SPWF1.9 SPWF1.10 | length 1.5
  Top Layer w0.25: SPWF1.9 SPWF1.10
N0178100: 
N250515: BQ1.5 BQ1.6 C21.1 C23.1 J1000.1 | length 13.4
  Top Layer w0.25: BQ1.6 BQ1.5 140.5,58.3 142.051,58.3 v1(142.585,58.834) ; J1000.1 150.7,59.2 150.9,59 150.9,57.3 C23.1@150.75,57.15
  Bottom Layer w0.25: v1(142.585,58.834) 142.551,58.868 142.883,59.2 J1000.1
N250559: BQ1.4 BQ1.8 BQ1.9 C22.1 J2000.1 | length 17.8
  Top Layer w0.25: BQ1.9 BQ1.8 139.87,56.78 139.55,57.1 139.55,58.78 ; BQ1.4 139.55,58.78 ; C22.1@150.3,63.15 150.3,63.2 150.26,63.24 147.95,63.24 147.34,63.24 147.25,63.15 142.25,63.15 139.55,60.45 139.55,58.78
N254329: BQ1.12 J1000.3 R24.2 | length 14.3
  Top Layer w0.25: v1(144.01,54.852) 143.98,54.882 BQ1.12 143.99,56.271 143.99,54.872 143.99,52.47 146.17,50.29 146.83,50.29 146.82,50.3 R24.2@146.783,50.3
  Bottom Layer w0.25: v1(144.01,54.852) 144.012,54.85 146.95,54.85 148.25,56.15 J1000.3
N254722: BQ1.15 BQ1.16 BQ1.17 C1.1 TPS1.1 TPS2.1 | length 24.9
  Top Layer w0.25: v1(142.821,57.292) 142.824,57.292 143.312,57.78 BQ1.15 BQ1.17 ; v1(152.2,54.75) 152.2,54.9 152.44,55.14 TPS1.1 ; v1(153.761,51.149) 153.761,50.419 TPS2.1 154.165,48.435 154.63,47.97 154.63,47.27 C1.1
  Bottom Layer w0.25: v1(142.821,57.292) 142.824,57.292 142.95,57.418 142.95,54.4 143.45,53.9 147.2,53.9 148.05,54.75 v1(152.2,54.75) 152.35,54.75 153.745,53.355 153.745,51.158 153.754,51.149 v1(153.761,51.149)
N254970: BQ1.13 R22.1 | length 5.4
  Top Layer w0.25: BQ1.13 146.02,56.78 146.65,56.15 146.65,54 R22.1@146.85,53.8
N255762: BQ1.14 R23.1 | length 8.8
  Top Layer w0.25: BQ1.14 144.78,57.28 145.274,57.774 v1(145.85,57.774) ; v1(145.855,55.797) 145.65,55.592 145.65,52.6 146.24,52.01 146.83,52.01 146.8,51.98 R23.1@146.8,51.95
  Bottom Layer w0.25: v1(145.85,57.774) 145.85,55.802 v1(145.855,55.797)
N257674: 41.4 BQ1.7 BQ1.20 | length 17.6
  Top Layer w0.25: BQ1.7 140.5,57.3 v1(141.4,57.3) ; v1(142.596,61.443) 142.619,61.466 142.634,61.466 142.95,61.15 142.95,60.31 BQ1.20
  Bottom Layer w0.25: v1(142.596,61.443) 142.619,61.42 142.57,61.42 141.4,60.25 v1(141.4,57.3) 141.4,54.55 145.6,50.35 41.4
N259078: BQ1.10 C23.2 R21.1 | length 21.1
  Top Layer w0.25: BQ1.10 141.48,51.54 144.57,48.45 148.275,48.45 150.9,51.075 150.9,55.933 C23.2@150.75,56.083
N0851300: 
N1115532: 
N1115572: A1.6 A1.7 R11.1 | length 2.6
  Top Layer w0.25: A1.6 A1.7 v1(155.94,16.34)
  Bottom Layer w0.25: v1(155.94,16.34) 156.84,16.34 R11.1
N1115652: IO1.8 MSP1000.8 | length 17.9
  Top Layer w0.25: IO1.8 159.258,27.1 v1(159.278,27.08) ; v1(172.379,29.279) 172.38,29.278 MSP1000.8
  Bottom Layer w0.25: v1(159.278,27.08) 159.308,27.05 160.6,27.05 162.9,29.35 172.308,29.35 v1(172.379,29.279)
N1115692: 
N1115772: 
N1116132: A1.3 A1.5 A1.12 R9.1 R3000.2 R5000.2 U1.1 U1.4 | length 31.6
  Top Layer w0.25: A1.5 154.86,17.6 156.2,17.6 v1@156.25,17.65 ; A1.3 155.72,18.88 156.25,18.35 v1@156.25,17.65 ; v1@156.3,17.55 v1(156.3,17.601) ; v1(162.9,17.6) 159.96,17.6 A1.12 159.94,17.61 159.931,17.601 v1(156.3,17.601) ; v1(167,21.7) U1.1 165.95,23.55 R5000.2@170.725,23.55 ; v1(168.073,18.927) v1(168.073,18.927) 168.128,18.928 168.65,19.45 U1.4 ; v1@156.25,17.65 156.3,17.7 v1(156.3,17.601)
  Bottom Layer w0.25: R9.1 v1(156.3,17.601) ; v1@156.3,17.55 v1(156.3,17.601) ; v1(162.9,17.6) 166.8,17.6 ; v1(167,21.7) 168.1,20.6 168.1,18.956 v1(168.073,18.927) v1@168.095,18.895 ; 166.8,17.6 168.073,18.873 v1(168.073,18.927) v1@168.095,18.895 ; 166.8,17.6 v1@168.095,18.895
N1116232: A1.10 R12.2 R13.1 | length 18.4
  Top Layer w0.25: A1.10 160.66,16.34 161.1,15.9 161.767,15.9 R12.2 161.8,15.936 161.927,16.063 v1(162.994,16.063)
  Bottom Layer w0.25: v1(162.994,16.063) 166.838,16.063 172.625,21.85 R13.1
N1116272: A1.4 C7000.1 C10000.1 C11000.1 IO1.7 R14.2 TPS1000.5 U1.5 | length 69.7
  Top Layer w0.25: A1.4 153.655,18.245 ; C7000.1 156.025,33.85 156.85,34.675 156.85,37.4 157.4,37.95 TPS1000.5 158.3,37.85 159.124,37.85 159.193,37.781 v1(159.193,37.926) ; IO1.7 158.2,27.75 159.2,28.75 v1(159.2,29.85) v1(159.2,29.85) 156.501,29.851 153.65,27 153.65,18.25 153.655,18.245 ; R14.2@167.625,16.175 164.925,16.175 163.75,15 154,15 153.655,15.345 153.655,18.245 ; R14.2 168.633,16.208 170.1,17.675 170.1,21.025 169.425,21.7 U1.5@168.667,21.7
  Bottom Layer w0.25: v1@159.19,29.86 153.9,35.15 153.9,36.35 155.476,37.926 v1(159.193,37.926) ; C10000.1 v1(159.2,29.85)
N1116312: A1.11 R11.2 R12.1 | length 4.2
  Top Layer w0.25: v1(158.859,16.734) 159.075,16.95 159.925,16.95 A1.11 161.775,16.975 R12.1
  Bottom Layer w0.25: R11.2 158.45,16.35 158.834,16.734 v1(158.859,16.734)
N1117332: A1.1 C2000.1 IO1.5 | length 10.6
  Top Layer w0.25: A1.1 154.85,21.35 154.85,27.25 156.65,29.05 IO1.5
N1117472: IO1.1 IO1.6 R4000.1 R7000.1 | length 12.5
  Top Layer w0.25: IO1.6@157.65,28.45 157.6,28.4 156.95,28.4 155.7,27.15 R4000.1 157.95,24.95 ; R7000.1 157.975,24.925 157.95,24.95 ; IO1.1 161.15,27.1 160.05,26 159,26 157.95,24.95
N1117592: A1.2 C2000.2 R4000.2 | length 5.4
  Top Layer w0.25: A1.2 154.865,19.5 155.6,19.5 155.917,19.817 155.917,22.958 155.7,23.175 R4000.2
N1117672: IO1.2 R1000.2 R5000.1 | length 16.2
  Top Layer w0.25: IO1.2 162.35,27.75 163.5,26.6 163.5,22.65 v1(164,22.15) ; v2(169.875,24.5) 170.6,24.5 R5000.1
  Bottom Layer w0.25: v1(164,22.15) 164.5,22.65 166.875,22.65 168.75,24.525 ; R1000.2 168.75,24.525 ; v2(169.875,24.5) 169.85,24.525 168.75,24.525
N1120272: IO1.3 R2000.2 R3000.1 | length 9.9
  Top Layer w0.25: IO1.3 161.75,28.4 163.6,28.4 164.45,27.55 164.45,26.05 165.25,25.25 ; R3000.1@164.875,23.55 164.875,24.875 165.25,25.25 ; 165.25,25.25 165.8,25.25 165.833,25.283 R2000.2 166.317,25.25 165.25,25.25
N1120352: 
N1120572: A1.15 C1000.1 R6000.1 R7000.2 | length 12.5
  Top Layer w0.25: R7000.2 158.742,22.933 159.155,22.52 v1(160.215,22.52) 160.345,22.52 v1@160.35,22.525 ; A1.15 159.935,19.5 159.25,19.5 158.7,20.05 158.7,20.85 160.35,22.5 v1@160.35,22.525 ; R6000.1 v1@160.35,22.525 ; v1(162.438,22.501) 162.45,22.513 C1000.1
  Bottom Layer w0.25: v1(160.215,22.52) 160.231,22.504 162.435,22.504 v1(162.438,22.501)
N1120612: A1.14 R8.1 R9.2 | length 4.7
  Top Layer w0.25: v1(158.85,18.905) 159.925,18.905 A1.14
  Bottom Layer w0.25: R9.2@155.45,19.45 R8.1 158.305,19.45 v1(158.85,18.905)
N1121792: A1.16 C1000.2 MSP1000.7 R6000.2 | length 23.8
  Top Layer w0.25: A1.16 160.85,20.15 161.3,20.6 v1@161.3,23.933 ; R6000.2 161.25,25.117 ; v1(161.268,23.901) v1@161.3,23.933 ; C1000.2 161.317,25.117 ; v1(167.225,24.495) 168.02,24.495 171.4,27.875 171.4,30.05 171.88,30.53 MSP1000.7 ; 161.25,25.117 161.3,25.067 ; 161.25,25.117 161.317,25.117 ; v1@161.3,23.933 161.3,25.067 ; 161.3,25.067 161.3,25.1 161.317,25.117
  Bottom Layer w0.25: v1(161.268,23.901) 161.276,23.909 161.276,23.988 161.288,24 166.73,24 v1(167.225,24.495)
N1122192: R14.1 R15.1 U1.3 | length 5.4
  Top Layer w0.25: R15.1@163.725,19.8 U1.3 165.95,19.3 167.625,17.625 R14.1
N1221322: MSP1000.18 TPS1000.3 | length 21.7
  Top Layer w0.25: v1@155.125,35.675 155.319,35.869 TPS1000.3 ; v1(169.926,32.534) 169.926,32.526 170.95,33.55 171.15,33.55 172.05,34.45 172.05,35.6 171.88,35.77 MSP1000.18
  Bottom Layer w0.25: v1@154.994,35.194 155.2,35.4 166.2,35.4 169.123,32.477 169.713,32.477 169.77,32.534 v1(169.926,32.534)
  other v1: 155.125,35.4
N1374022: J1.3 MSP1000.5 R10.2 | length 18
  Top Layer w0.25: R10.2@166.2,34.25 166.2,38.85 167.1,39.75 169.9,39.75 170.3,39.35 J1.3 ; MSP1000.5 170.9,31.395 170.9,32.1 v1(171.35,32.55)
  Bottom Layer w0.25: J1.3 170.125,38.175 170.125,33.775 v1(171.35,32.55)
N1374062: J1.2 MSP1000.29 | length 5.8
  Top Layer w0.25: MSP1000.29 168.75,33.6 169.217,34.067 v1(169.217,35.026)
  Bottom Layer w0.25: J1.2 169.07,35.278 169.322,35.026 v1(169.217,35.026)
N1381372: C3000.2 C5000.2 C6000.2 C9000.2 J1.4 L1000.2 MSP1000.1 SPWF1000.2 SPWF1000.23 TPS2000.2 TPS2000.3 | length 53
  Top Layer w0.25: L1000.2@160.325,33.507 160.325,35.375 TPS2000.3@161,36.05 ; L1000.2@160.375,33.4 161.55,33.4 162.142,32.808 C5000.2@162.825,32.808 ; TPS2000.3 TPS2000.2 ; C5000.2 C5000.2@162.825,32.808 ; v1(168.856,30.427) 168.88,30.451 MSP1000.1 168.125,31.375 167.533,30.783 C3000.2 166.55,30.225 166.083,29.758 C6000.2 163.442,29.758 162.825,30.375 C5000.2@162.825,32.808
  Bottom Layer w0.25: v1(168.856,30.427) 168.879,30.45 170.95,30.45 173.105,32.605 C9000.2 173.917,34.383 174.274,34.026 181.074,34.026 ; J1.4 176.75,38.35 181.074,34.026 ; 181.1,34 181.074,34.026 ; SPWF1000.2 181.074,34.026
N1396582: C3000.1 C6000.1 C9000.1 J1.1 MSP1000.30 R10.1 R16.2 SPWF1000.24 TPS2000.5 | length 36.2
  Top Layer w0.25: TPS2000.5 164.6,37.9 v1(165.05,38.35) ; C6000.1 164.475,31.3 165.15,31.975 ; 164.575,37.875 165.15,37.3 R10.1 165.15,31.975 ; MSP1000.30 169.2,33.1 v1(171.2,35.1) ; MSP1000.30 167.7,33.1 166.55,31.95 C3000.1 166.425,31.975 165.15,31.975 ; v1(177.488,35.51) 180.34,35.51 182.183,33.667 R16.2
  Bottom Layer w0.25: v1(165.05,38.35) J1.1 ; v1(171.2,35.1) 171.55,35.45 C9000.1 175.53,35.45 SPWF1000.24 177.448,35.55 v1(177.488,35.51)
N1402492: 
N1404412: C5000.1 TPS2000.4 | length 2.7
  Top Layer w0.25: C5000.1 162.825,34.55 163.775,35.5 TPS2000.4@163.775,35.925 ; TPS2000.4@163.5,35.8 TPS2000.4
N1404812: C8000.1 TPS1000.4 | length 3.5
  Top Layer w0.25: C8000.1@157.9,32.65 C8000.1 157.95,33.85 158.2,34.1 TPS1000.4
N1587662: MSP1000.16 R16.1 SPWF1000.3 | length 18.7
  Top Layer w0.25: MSP1000.16 175.3,35.6 178.3,32.6 R16.1 v1(188.9,32.6)
  Bottom Layer w0.25: v1(188.9,32.6) 190.402,32.6 SPWF1000.3
N1590062: MSP1000.13 SPWF1000.8 | length 21.2
  Top Layer w0.25: MSP1000.13 173.5,34.1 182.7,24.9 v1(188.55,24.9)
  Bottom Layer w0.25: v1(188.55,24.9) 190.482,24.9 SPWF1000.8
N1594672: MSP1000.14 SPWF1000.6 | length 20.2
  Top Layer w0.25: MSP1000.14 174.55,34.6 181.2,27.95 v1(188.55,27.95)
  Bottom Layer w0.25: v1(188.55,27.95) 190.48,27.95 SPWF1000.6
N1621192: SPWF1000.9 SPWF1000.10 | length 1.5
  Bottom Layer w0.25: SPWF1000.10 SPWF1000.9
N2505072: 
N2505152: BQ1000.5 BQ1000.6 C1000000.1 C3000000.1 J1000000.1 | length 13.8
  Top Layer w0.25: BQ1000.6 BQ1000.5 ; BQ1000.5@141.06,33.55 BQ1000.5 ; v1(142.187,34.332) 142.187,34.011 141.756,33.58 BQ1000.5 ; J1000000.1 148.843,34.457 151.247,34.457 C1000000.1 151.297,32.056 C3000000.1
  Bottom Layer w0.25: v1(142.187,34.332) 142.355,34.5 J1000000.1
N2505592: BQ1000.4 BQ1000.8 BQ1000.9 C2000000.1 J2000000.1 | length 18.2
  Top Layer w0.25: BQ1000.9 BQ1000.8 140.52,32.08 140.1,32.5 140.1,34.15 ; BQ1000.4 140.17,34.08 140.1,34.15 ; C2000000.1 J2000000.1 142.94,38.54 140.1,35.7 140.1,34.15
N2543292: BQ1000.12 J1000000.3 R4000000.2 | length 14.1
  Top Layer w0.25: v1(144.56,30.152) 144.53,30.182 BQ1000.12 144.54,31.571 144.54,30.172 144.54,28.11 147.06,25.59 R4000000.2@147.38,25.59
  Bottom Layer w0.25: v1(144.56,30.152) 144.562,30.15 147.5,30.15 148.8,31.45 J1000000.3
N2547222: BQ1000.15 BQ1000.16 BQ1000.17 C4000.1 TPS1000.1 TPS2000.1 | length 32
  Top Layer w0.25: v1(143.263,32.6) 143.743,33.08 BQ1000.15 BQ1000.16 BQ1000.17 ; v1(152.648,36.551) 152.666,36.569 152.666,36.598 v1@152.675,36.607 ; v1@152.847,36.749 154.054,37.957 155.493,37.957 TPS1000.1 155.5,38.4 155.9,38.8 160.575,38.8 161,38.375 TPS2000.1 ; v1(153.55,34.15) 153.85,33.85 C4000.1@153.85,32.9 ; C4000.1 C4000.1@153.85,32.85
  Bottom Layer w0.25: v1(143.263,32.6) 143.25,32.587 143.25,29.85 143.9,29.2 148.6,29.2 v1@153.5,34.1 ; v1(152.648,36.551) 152.648,35.052 v1(153.55,34.15)
N2549702: BQ1000.13 R2000000.1 | length 5.1
  Top Layer w0.25: BQ1000.13 146.47,32.08 147.37,31.18 R2000000.1
N2557622: BQ1000.14 R3000000.1 | length 8.7
  Top Layer w0.25: BQ1000.14 145.28,32.58 145.774,33.074 v1(146.4,33.074) ; v1(146.159,30.991) 146.159,28.091 146.94,27.31 R3000000.1
  Bottom Layer w0.25: v1(146.159,30.991) 146.35,31.182 146.35,33 146.4,33.05 v1(146.4,33.074)
N2576742: 48.4 BQ1000.7 BQ1000.20 | length 19.6
  Top Layer w0.25: v1(142.1,23.7) 143.6,23.7 144.717,22.583 v1(144.763,22.583) ; v1(142.1,32.58) BQ1000.7 142.08,32.58 143.53,34.03 BQ1000.20
  Bottom Layer w0.25: v1(142.1,23.7) v1(142.1,32.58) ; v1(144.763,22.583) 144.763,22.537 145.35,21.95 48.4
N2590782: BQ1000.10 C3000000.2 R1000000.1 | length 20.2
  Top Layer w0.25: BQ1000.10 142.03,27.77 146.2,23.6 148.4,23.6 151.55,26.75 151.55,29.625 151.297,29.878 151.297,30.983 C3000000.2
NET_44: 48.8 R13.2 | length 30.8
  Bottom Layer w0.25: 48.8 147.35,23.3 150.45,26.4 161.6,26.4 163.75,28.55 169.65,28.55 172.158,26.042 R13.2
NET_45: 48.11 R2000.1 | length 20.4
  Top Layer w0.25: v1(165.6,26.35) R2000.1
  Bottom Layer w0.25: 48.11@148.85,20.925 148.85,22 151.65,24.8 163,24.8 164.55,26.35 v1(165.6,26.35)
NET_47: 
NET_48: 
NET_49: 
NET_50: 
NET_51: 
NET_52: 
NET_53: 
NET_54: 
NET_55: 
NET_56: 
NET_57: 
NET_58: 
NET_59: 
NET_60: 
NET_61: 
NET_62: 
NET_150: 41.11 ADS1.1 | length 19.1
  Top Layer w0.25: v1(163.336,46.746) 163.353,46.763 163.353,46.769 163.35,46.772 163.35,46.85 ADS1.1
  Bottom Layer w0.25: 41.11 149.1,49.475 149.425,49.8 154,49.8 158.075,45.725 161.525,45.725 162.5,46.7 163.382,46.7 v1(163.336,46.746)
NET_151: 41.10 ADS1.2 | length 20.8
  Top Layer w0.25: v1(163.006,45.304) 162.937,45.373 162.937,45.387 163.05,45.5 163.7,45.5 164,45.8 164.6,45.8 165.2,46.4 ADS1.2
  Bottom Layer w0.25: 41.10 148.6,45.8 149.5,44.9 162.451,44.9 162.878,45.327 162.983,45.327 v1(163.006,45.304)
NET_152: 41.8 ADS1.3 | length 23.7
  Top Layer w0.25: v1(165.095,45.208) 165.168,45.208 165.246,45.286 165.246,45.346 165.7,45.8 ADS1.3
  Bottom Layer w0.25: 41.8 147.6,45.1 148.7,44 163.5,44 164.7,45.2 165.097,45.2 165.089,45.208 v1(165.095,45.208)
NET_153: 41.5 ADS1.4 | length 25.2
  Top Layer w0.25: v1(146.084,46.82) 146.084,46.305 148.089,44.3 165.5,44.3 166.2,45 ADS1.4
  Bottom Layer w0.25: v1(146.084,46.82) 146.1,46.804 41.5
NET_154: 41.3 ADS1.5 | length 28.6
  Top Layer w0.25: ADS1.5 166.694,46.844 166.694,45.556 167,45.25 167,44.795 v1(166.99,44.785)
  Bottom Layer w0.25: 41.3 145.1,45.8 147.9,43 165.25,43 166.99,44.74 v1(166.99,44.785)
NET_155: 41.2 ADS1.6 | length 31.3
  Top Layer w0.25: v1(144.553,44.141) 144.553,43.797 144.9,43.45 167.05,43.45 167.95,44.35 167.95,45.6 167.2,46.35 ADS1.6
  Bottom Layer w0.25: v1@144.603,44.141 41.2@144.603,48.353
NET_412: 
NET_422: 48.10 R1000.1 | length 24.5
  Bottom Layer w0.25: 48.10 148.325,20.975 148.325,22.7 151.225,25.6 162.2,25.6 164.3,27.7 167.625,27.7 168.325,27 R1000.1
NET_432: 
T1: 
T2: 
VI00: 
VIN1: 
VREF: 
VREF00: 
pads on no net: 41.6 41.7 41.9 41.12 41.13 41.14 41.15 41.16 48.2 48.3 48.5 48.6 48.7 48.9 48.12 48.13 48.14 48.15 48.16 A1.8 A1.9 ADS1.7 BQ1.1 BQ1.2 BQ1.3 BQ1.18 BQ1000.1 BQ1000.2 BQ1000.3 BQ1000.18 MSP1.2 MSP1.3 MSP1.4 MSP1.16 MSP1.17 MSP1.19 MSP1.20 MSP1.21 MSP1.22 MSP1.23 MSP1.24 MSP1.26 MSP1.27 MSP1.28 MSP1.31 MSP1.32 MSP1000.2 MSP1000.3 MSP1000.4 MSP1000.6 MSP1000.9 MSP1000.10 MSP1000.11 MSP1000.12 MSP1000.15 MSP1000.17 MSP1000.19 MSP1000.20 MSP1000.21 MSP1000.22 MSP1000.23 MSP1000.24 MSP1000.25 MSP1000.26 MSP1000.27 MSP1000.28 MSP1000.31 MSP1000.32 SPWF1.1 SPWF1.4 SPWF1.5 SPWF1.7 SPWF1.11 SPWF1.12 SPWF1.13 SPWF1.14 SPWF1.15 SPWF1.16 SPWF1.17 SPWF1.18 SPWF1.19 SPWF1.20 SPWF1.21 SPWF1.22 SPWF1.25 SPWF1.26 SPWF1.27 SPWF1.28 SPWF1.29 SPWF1.30 SPWF1000.1 SPWF1000.4 SPWF1000.5 SPWF1000.7 SPWF1000.11 SPWF1000.12 SPWF1000.13 SPWF1000.14 SPWF1000.15 SPWF1000.16 SPWF1000.17 SPWF1000.18 SPWF1000.19 SPWF1000.20 SPWF1000.21 SPWF1000.22 SPWF1000.25 SPWF1000.26 SPWF1000.27 SPWF1000.28 SPWF1000.29 SPWF1000.30

## Polygon pours and split planes (outlines as drawn)
GND1 on Top Layer "Top_GND" (solid, remove dead copper, pour order 5): 195,61.575 195,44.475 192.9,42.375 141.825,42.375 138.95,45.25 138.95,61.275 142.625,64.95 191.625,64.95
GND2 on Top Layer "Top_GND" (solid, remove dead copper, pour order 8): 139.625,36.675 143.225,40.275 188.45,40.275 192.2,36.525 192.2,17.7 171.825,17.7 168.375,14.4 143.225,14.4 139.625,18
N108466 on Bottom Layer "Bottom_GND" (solid, remove dead copper, pour order 7): 139,61.375 139,45.125 141.75,42.375 192.9,42.375 195.05,44.525 195.05,61.55 191.55,65.05 142.675,65.05
N1381372 on Bottom Layer "Bottom_GND" (solid, remove dead copper, pour order 6): 139.603,36.672 143.203,40.272 188.428,40.272 192.178,36.522 192.178,17.697 171.803,17.697 168.353,14.397 143.203,14.397 139.603,17.997

## Keep-outs
Keep-Out Layer:
  lines w0.254: 138.375,45.75 ccw(c142.425,45.75) 142.425,41.7 192.25,41.7 ccw(c192.25,45.125) 195.675,45.125 195.675,61.394 ccw(c191.683,61.394) 191.683,65.386 142.489,65.386 ccw(c142.362,61.398) 138.375,61.525 138.375,45.75 ; 138.925,18.75 ccw(c143.825,18.75) 143.825,13.85 188.75,13.85 ccw(c188.75,17.9) 192.8,17.9 192.8,36.05 ccw(c187.925,36.05) 187.925,40.925 143.45,40.925 ccw(c143.35,36.5) 138.925,36.6 138.925,18.75

## Silkscreen, mask and mechanical layers (free items; w line width, h text height)
Top Overlay:
  text "IITKGP" at 176.25,18.7 h1.43
Bottom Overlay:
  text "IITKGP" at 176.75,45 h1.43

## Dimensions
138.575,65.75 to 138.85,41.925 on Top Overlay
138.55,40.925 to 138.55,14 on Top Overlay
138.575,13.474 to 192.725,13.2 on Top Overlay